# EAGLE board CT_schematic (EAGLE 7.6.0)

Size 100 x 80 mm. Coordinates in mm from the lower left corner, seen from the top.
Outline: 0,0 100,0 100,80 0,80 0,0
Copper layers (1*16): Top 0.035mm / dielectric 1.5mm / Bottom 0.035mm
Design rules "default": minimum track width 10mil, minimum drill 24mil, track to track 8mil, track to pad 8mil, pad to pad 8mil, via to via 8mil, smd to smd 8mil, copper to edge 40mil, drill to drill 8mil, minimum pad ring 10mil, minimum via ring 8mil, stop-mask expansion 4mil, vias tented up to drill 0mil, thermal gap 10mil

## Footprints (pad centres in the part's own frame; a part is rotated, then mirrored left to right if it is on the bottom)
C0603 = smd 0.8 x 0.8: 1 -0.762,0; 2 0.762,0
C0402 = smd 0.5 x 0.5: 1 -0.508,0; 2 0.508,0
C0805 = smd 1.2 x 1.3: 1 -1.016,0; 2 1.016,0
EXV-9B = smd 2.718 x 1.778: 1 -2.108,0; 2 2.108,0
EXV-9H = smd 3.505 x 1.676: 1 -2.857,0; 2 2.857,0
PJ-037B_PACKAGE = drill 3.7 square: 1 12,0 | drill 3.2 square: 2 6,0
R0603 = smd 0.8 x 0.8: 1 -0.762,0; 2 0.762,0
LQFP100 = smd 0.3 x 1.2: 1 -6,-7.75; 2 -5.5,-7.75; 3 -5,-7.75; 4 -4.5,-7.75; 5 -4,-7.75; 6 -3.5,-7.75; 7 -3,-7.75; 8 -2.5,-7.75; 9 -2,-7.75; 10 -1.5,-7.75; 11 -1,-7.75; 12 -0.5,-7.75; 13 0,-7.75; 14 0.5,-7.75; 15 1,-7.75; 16 1.5,-7.75; 17 2,-7.75; 18 2.5,-7.75; 19 3,-7.75; 20 3.5,-7.75; 21 4,-7.75; 22 4.5,-7.75; 23 5,-7.75; 24 5.5,-7.75; 25 6,-7.75; 51 6,7.75; 52 5.5,7.75; 53 5,7.75; 54 4.5,7.75; 55 4,7.75; 56 3.5,7.75; 57 3,7.75; 58 2.5,7.75; 59 2,7.75; 60 1.5,7.75; 61 1,7.75; 62 0.5,7.75; 63 0,7.75; 64 -0.5,7.75; 65 -1,7.75; 66 -1.5,7.75; 67 -2,7.75; 68 -2.5,7.75; 69 -3,7.75; 70 -3.5,7.75; 71 -4,7.75; 72 -4.5,7.75; 73 -5,7.75; 74 -5.5,7.75; 75 -6,7.75 | smd 1.2 x 0.3: 26 7.75,-6; 27 7.75,-5.5; 28 7.75,-5; 29 7.75,-4.5; 30 7.75,-4; 31 7.75,-3.5; 32 7.75,-3; 33 7.75,-2.5; 34 7.75,-2; 35 7.75,-1.5; 36 7.75,-1; 37 7.75,-0.5; 38 7.75,0; 39 7.75,0.5; 40 7.75,1; 41 7.75,1.5; 42 7.75,2; 43 7.75,2.5; 44 7.75,3; 45 7.75,3.5; 46 7.75,4; 47 7.75,4.5; 48 7.75,5; 49 7.75,5.5; 50 7.75,6; 76 -7.75,6; 77 -7.75,5.5; 78 -7.75,5; 79 -7.75,4.5; 80 -7.75,4; 81 -7.75,3.5; 82 -7.75,3; 83 -7.75,2.5; 84 -7.75,2; 85 -7.75,1.5; 86 -7.75,1; 87 -7.75,0.5; 88 -7.75,0; 89 -7.75,-0.5; 90 -7.75,-1; 91 -7.75,-1.5; 92 -7.75,-2; 93 -7.75,-2.5; 94 -7.75,-3; 95 -7.75,-3.5; 96 -7.75,-4; 97 -7.75,-4.5; 98 -7.75,-5; 99 -7.75,-5.5; 100 -7.75,-6
SOIC-8 = smd 1.6 x 0.6: 1 -2.7,1.905 | smd 1.55 x 0.6: 2 -2.7,0.635; 3 -2.7,-0.635; 4 -2.7,-1.905; 5 2.7,-1.905; 6 2.7,-0.635; 7 2.7,0.635; 8 2.7,1.905
MOLEX_47219-2001 = smd 0.8 x 1.5: 1 3.2,-2.1; 2 2.1,-2.1; 3 1,-2.1; 4 -0.1,-2.1; 5 -1.2,-2.1; 6 -2.3,-2.1; 7 -3.4,-2.1; 8 -4.5,-2.1 | smd 1.5 x 2.05: G1 6.875,-4.7; G2 6.875,3.6; G3 -6.875,3.6; G4 -6.875,-4.7
QFN-16 = smd 0.813 x 0.305: 1 -1.448,0.75; 2 -1.448,0.25; 3 -1.448,-0.25; 4 -1.448,-0.75; 9 1.448,-0.75; 10 1.448,-0.25; 11 1.448,0.25; 12 1.448,0.75 | smd 0.305 x 0.813: 5 -0.75,-1.448; 6 -0.25,-1.448; 7 0.25,-1.448; 8 0.75,-1.448; 13 0.75,1.448; 14 0.25,1.448; 15 -0.25,1.448; 16 -0.75,1.448 | smd 1.803 x 1.803: 17 0,0
WFDN-8 = smd 0.48 x 0.7: 1 0,0; 2 1.27,0; 3 2.54,0; 4 3.81,0; 5 3.81,4.45; 6 2.54,4.45; 7 1.27,4.45; 8 0,4.45 | smd 4 x 3: 9 1.89,2.25
USB-A-H = drill 0.914: 1 2.718,3.493; 2 2.718,1.003; 3 2.718,-1.003; 4 2.718,-3.493 | drill 2.311: 5 0,-6.566; 6 0,6.566
SOT143B = smd 1 x 0.7: 1 -0.75,-1 | smd 0.6 x 0.7: 2 0.95,-1; 3 0.95,1; 4 -0.95,1
ASEK = smd 1.4 x 1: 1 -1.1,-0.8; 2 1.1,-0.8; 3 1.1,0.8; 4 -1.1,0.8
ASFL1 = smd 1.7 x 1.5: 1 -1.27,-1.1; 2 1.27,-1.1; 3 1.27,1.1; 4 -1.27,1.1
LP2954 = smd 1.6 x 0.6: 1 -2.475,1.905 | smd 1.55 x 0.6: 2 -2.475,0.635; 3 -2.475,-0.635; 4 -2.475,-1.905; 5 2.475,-1.905; 6 2.475,-0.635; 7 2.475,0.635; 8 2.475,1.905
SON-6 = smd 0.55 x 0.3: 1 -0.355,0.5 | smd 0.52 x 0.3: 2 -0.37,0; 3 -0.37,-0.5; 4 0.37,-0.5; 5 0.37,0; 6 0.37,0.5
SW_4-1437565-2 = smd 1.4 x 2.1: 1 -2.23,4.55; 2 -2.23,-4.55; 3 2.23,4.55; 4 2.23,-4.55
LGM67K-G1J2-24-Z = smd 0.8 x 1.4: A -2,0; C 0,0
NC7SZ125M5X = smd 1.3 x 0.7: 1 -1.3,0.95; 2 -1.3,0; 3 -1.3,-0.95; 4 1.3,-0.95; 5 1.3,0.95
DUMMY_PACKAGE_160 = drill 0.3: 1 0,-1; 2 1.5,-1

## Placement (x,y rotation side)
C1  1e-06  [C0603]  -43.18,62.23 0 top  (outside the outline)
C2  1e-07  [C0603]  -46.99,62.23 0 top  (outside the outline)
C3  1e-07  [C0603]  -50.8,62.23 0 top  (outside the outline)
C4  1e-07  [C0603]  -54.61,62.23 0 top  (outside the outline)
C5  1e-07  [C0603]  -58.42,62.23 0 top  (outside the outline)
C6  1e-07  [C0603]  -62.23,62.23 0 top  (outside the outline)
C7  1e-07  [C0603]  -66.04,62.23 0 top  (outside the outline)
C8  4.7e-06  [C0603]  -39.37,62.23 0 top  (outside the outline)
C9  1e-07  [C0603]  -69.85,62.23 0 top  (outside the outline)
C10  1e-08  [C0603]  -15.24,67.31 0 top  (outside the outline)
C11  1e-06  [C0603]  -19.05,67.31 0 top  (outside the outline)
C12  1e-08  [C0402]  -57.15,67.31 0 top  (outside the outline)
C13  1e-07  [C0402]  -60.96,67.31 0 top  (outside the outline)
C14  1e-05  [C0805]  -39.37,50.8 0 top  (outside the outline)
C15  4.7e-06  [C0805]  -44.45,50.8 0 top  (outside the outline)
C16  1e-07  [C0402]  -64.77,67.31 0 top  (outside the outline)
C17  1e-07  [C0402]  -68.58,67.31 0 top  (outside the outline)
C18  1e-07  [C0402]  -72.39,67.31 0 top  (outside the outline)
C19  1e-08  [C0402]  -15.24,72.39 0 top  (outside the outline)
C20  1e-08  [C0402]  -19.05,72.39 0 top  (outside the outline)
C21  1e-06  [EXV-9B]  -16.51,50.8 0 top  (outside the outline)
C22  2.2e-06  [EXV-9B]  -25.4,50.8 0 top  (outside the outline)
C23  1e-07  [C0402]  -22.86,72.39 0 top  (outside the outline)
C24  0.0001  [EXV-9H]  -38.1,44.45 0 top  (outside the outline)
C25  0.0001  [EXV-9H]  -49.53,44.45 0 top  (outside the outline)
C26  1e-08  [C0402]  -26.67,72.39 0 top  (outside the outline)
J1  PJ-037B  [PJ-037B_PACKAGE]  -27.94,24.13 0 top  (outside the outline)
R2  1000.0  [R0603]  -22.86,67.31 0 top  (outside the outline)
R4  4700.0  [R0603]  -26.67,67.31 0 top  (outside the outline)
R5  2200.0  [R0603]  -30.48,67.31 0 top  (outside the outline)
R6  2200.0  [R0603]  -34.29,67.31 0 top  (outside the outline)
R7  2200.0  [R0603]  -38.1,67.31 0 top  (outside the outline)
R8  2200.0  [R0603]  -41.91,67.31 0 top  (outside the outline)
R9  10000.0  [R0603]  -66.04,57.15 0 top  (outside the outline)
R10  10000.0  [R0603]  -71.12,57.15 0 top  (outside the outline)
R11  10000.0  [R0603]  -15.24,62.23 0 top  (outside the outline)
R12  10000.0  [R0603]  -20.32,62.23 0 top  (outside the outline)
R13  100000.0  [R0603]  -54.61,50.8 0 top  (outside the outline)
R14  100000.0  [R0603]  -59.69,50.8 0 top  (outside the outline)
R15  100000.0  [R0603]  -64.77,50.8 0 top  (outside the outline)
R16  100000.0  [R0603]  -69.85,50.8 0 top  (outside the outline)
R17  100000.0  [R0603]  -15.24,57.15 0 top  (outside the outline)
R18  100000.0  [R0603]  -20.32,57.15 0 top  (outside the outline)
R19  10000.0  [R0603]  -25.4,62.23 0 top  (outside the outline)
R20  100000.0  [R0603]  -25.4,57.15 0 top  (outside the outline)
R21  100000.0  [R0603]  -30.48,57.15 0 top  (outside the outline)
R22  100000.0  [R0603]  -35.56,57.15 0 top  (outside the outline)
R23  100000.0  [R0603]  -40.64,57.15 0 top  (outside the outline)
R24  100000.0  [R0603]  -45.72,57.15 0 top  (outside the outline)
R25  164658.62  [R0603]  -49.53,50.8 0 top  (outside the outline)
R26  100000.0  [R0603]  -50.8,57.15 0 top  (outside the outline)
R27  10000.0  [R0603]  -30.48,62.23 0 top  (outside the outline)
R28  10000.0  [R0603]  -35.56,62.23 0 top  (outside the outline)
R29  9100.0  [R0603]  -45.72,67.31 0 top  (outside the outline)
R30  680000.0  [R0603]  -55.88,57.15 0 top  (outside the outline)
R31  120000.0  [R0603]  -60.96,57.15 0 top  (outside the outline)
U1  STM32L475VET6  [LQFP100]  -24.13,8.89 0 top  (outside the outline)
U2  24AA1025T-I/SN  [SOIC-8]  -40.64,35.56 0 top  (outside the outline)
U3  0472192001  [MOLEX_47219-2001]  -59.69,8.89 0 top  (outside the outline)
U4  MMA8451QT  [QFN-16]  -50.8,67.31 0 top  (outside the outline)
U5  SST26VF032B-104I/MF  [WFDN-8]  -67.31,21.59 0 top  (outside the outline)
U6  61400416021  [USB-A-H]  -39.37,8.89 0 top  (outside the outline)
U7  prtr5v0u2ax  [SOT143B]  -39.37,72.39 0 top  (outside the outline)
U8  ASEK-32.768KHz-ECST  [ASEK]  -29.21,44.45 0 top  (outside the outline)
U9  ASFL1-25MHZ-NCS  [ASFL1]  -58.42,35.56 0 top  (outside the outline)
U10  LP2954AIMX/NOPB  [LP2954]  -25.4,35.56 0 top  (outside the outline)
U11  TPS3895ADRYR  [SON-6]  -46.99,71.12 0 top  (outside the outline)
U12  4-1437565-2  [SW_4-1437565-2]  -44.45,24.13 0 top  (outside the outline)
U13  Q65110A2395  [LGM67K-G1J2-24-Z]  -59.69,43.18 0 top  (outside the outline)
U14  nc7sz125m5x  [NC7SZ125M5X]  -33.02,50.8 0 top  (outside the outline)
U15  Dummy  [DUMMY_PACKAGE_160]  -44.45,72.39 0 top  (outside the outline)

## Library data of the parts
C1-C26 J1 R2 R4-R31 U1-U15 = circuit_tree

## Nets
CLK_U1_8: U1.8 U8.3
CLK_U1_12: U1.12 U9.3
GND: C1.2 C2.2 C3.2 C4.2 C5.2 C6.2 C7.2 C8.2 C9.2 C10.2 C11.2 C12.2 C13.2 C14.2 C15.2 C16.2 C17.2 C18.2 C19.2 C20.2 C21.2 C22.2 C23.2 C24.2 C25.2 C26.2 J1.2 R2.2 R9.2 R11.2 R19.2 R26.2 R29.2 R31.2 U1.10 U1.19 U1.20 U1.27 U1.49 U1.74 U1.99 U2.4 U2.7 U3.6 U3.G1 U3.G2 U3.G3 U3.G4 U4.5 U4.10 U4.12 U4.17 U5.4 U5.9 U6.4 U6.5 U6.6 U7.1 U8.2 U9.2 U10.4 U11.2 U13.C U14.1 U14.3 U15.1
NET_U1_14: R4.1 U1.14 U14.4
NET_U1_22: U1.21 U1.22
NET_U1_47: R7.1 U1.47 U2.6
NET_U1_48: R8.1 U1.48 U2.5
NET_U1_92: R5.1 U1.92 U4.4
NET_U1_93: R6.1 U1.93 U4.6
NET_U1_94: R9.1 U1.94
NET_U1_97: U13.A
NET_U1_98: U12.3 U12.4
NET_U2_1: R11.1 U2.1
NET_U2_2: R12.1 U2.2
NET_U2_3: R10.1 U2.3
NET_U4_2: C17.1 U4.2
NET_U4_7: R19.1 U4.7
NET_U10_3: R24.1 U10.3
NET_U10_5: R23.1 U10.5
NET_U10_7: R25.2 R26.1 U10.7
NET_U11_1: R28.1 R29.1 U11.1
NET_U11_3: R30.2 R31.1 U11.3
NET_U11_4: R27.1 U11.4 U14.2
NET_U12_1: R2.1 U12.1 U12.2
PROC_DAC1_OUT2: U1.30 U15.2
PROC_QUADSPI_BK1_IO0: U1.36 U5.5
PROC_QUADSPI_BK1_IO1: U1.35 U5.2
PROC_QUADSPI_BK1_IO2: R21.1 U1.32 U5.3
PROC_QUADSPI_BK1_IO3: R22.1 U1.31 U5.7
PROC_QUADSPI_CLK: U1.41 U5.6
PROC_QUADSPI_NCS: R20.1 U1.42 U5.1
PROC_SDMMC1_CK: R14.1 U1.80 U3.5
PROC_SDMMC1_CMD: R13.1 U1.83 U3.3
PROC_SDMMC1_D0: R15.1 U1.65 U3.7
PROC_SDMMC1_D1: R16.1 U1.66 U3.8
PROC_SDMMC1_D2: R17.1 U1.78 U3.1
PROC_SDMMC1_D3: R18.1 U1.79 U3.2
PROC_USB_OTG_FS_DM: U6.2 U7.3
PROC_USB_OTG_FS_DP: U6.3 U7.2
PROC_USB_OTG_FS_VBUS: U6.1 U7.4
VCC_S1_16V8: C21.1 C24.1 C25.1 J1.1 R24.2 U10.8
VCC_TIER1_3V3: C1.1 C2.1 C3.1 C4.1 C5.1 C6.1 C7.1 C8.1 C9.1 C10.1 C11.1 C12.1 C13.1 C14.1 C15.1 C16.1 C18.1 C19.1 C20.1 C22.1 C23.1 C26.1 R4.2 R5.2 R6.2 R7.2 R8.2 R10.2 R12.2 R13.2 R14.2 R15.2 R16.2 R17.2 R18.2 R20.2 R21.2 R22.2 R23.2 R25.1 R27.2 R28.2 R30.1 U1.6 U1.11 U1.22 U1.28 U1.50 U1.73 U1.75 U1.100 U2.8 U3.4 U4.1 U4.14 U5.8 U8.4 U9.4 U10.1 U11.6 U14.5

## Tracks (layer width: path | path; a pad name or v marks a point on that pad's centre or on a via)
CLK_U1_8  (1 unrouted)
CLK_U1_12  (1 unrouted)
GND  (65 unrouted)
NET_U1_14  (2 unrouted)
NET_U1_22  (1 unrouted)
NET_U1_47  (2 unrouted)
NET_U1_48  (2 unrouted)
NET_U1_92  (2 unrouted)
NET_U1_93  (2 unrouted)
NET_U1_94  (1 unrouted)
NET_U1_98  (1 unrouted)
NET_U2_1  (1 unrouted)
NET_U2_2  (1 unrouted)
NET_U2_3  (1 unrouted)
NET_U4_2  (1 unrouted)
NET_U4_7  (1 unrouted)
NET_U10_3  (1 unrouted)
NET_U10_5  (1 unrouted)
NET_U10_7  (2 unrouted)
NET_U11_1  (2 unrouted)
NET_U11_3  (2 unrouted)
NET_U11_4  (2 unrouted)
NET_U12_1  (2 unrouted)
PROC_DAC1_OUT2  (1 unrouted)
PROC_QUADSPI_BK1_IO0  (1 unrouted)
PROC_QUADSPI_BK1_IO1  (1 unrouted)
PROC_QUADSPI_BK1_IO2  (2 unrouted)
PROC_QUADSPI_BK1_IO3  (2 unrouted)
PROC_QUADSPI_CLK  (1 unrouted)
PROC_QUADSPI_NCS  (2 unrouted)
PROC_SDMMC1_CK  (2 unrouted)
PROC_SDMMC1_CMD  (2 unrouted)
PROC_SDMMC1_D0  (2 unrouted)
PROC_SDMMC1_D1  (2 unrouted)
PROC_SDMMC1_D2  (2 unrouted)
PROC_SDMMC1_D3  (2 unrouted)
PROC_USB_OTG_FS_DM  (1 unrouted)
PROC_USB_OTG_FS_DP  (1 unrouted)
PROC_USB_OTG_FS_VBUS  (1 unrouted)
VCC_S1_16V8  (5 unrouted)
VCC_TIER1_3V3  (60 unrouted)